# Altium PCB PY32F002BF1xP_START.PcbDoc (part 1 of 2)
Units mil, origin at the board's own origin, x right, y up, seen from the top; angles counter-clockwise.
Board outline 1771.65 x 3929.06 mil, 2 copper layers (Top Layer, Bottom Layer), stack 21 mil thick; 129 components, 114 nets, 456 pads, 229 vias.
Unrouted connection lines stored in the file: 5.
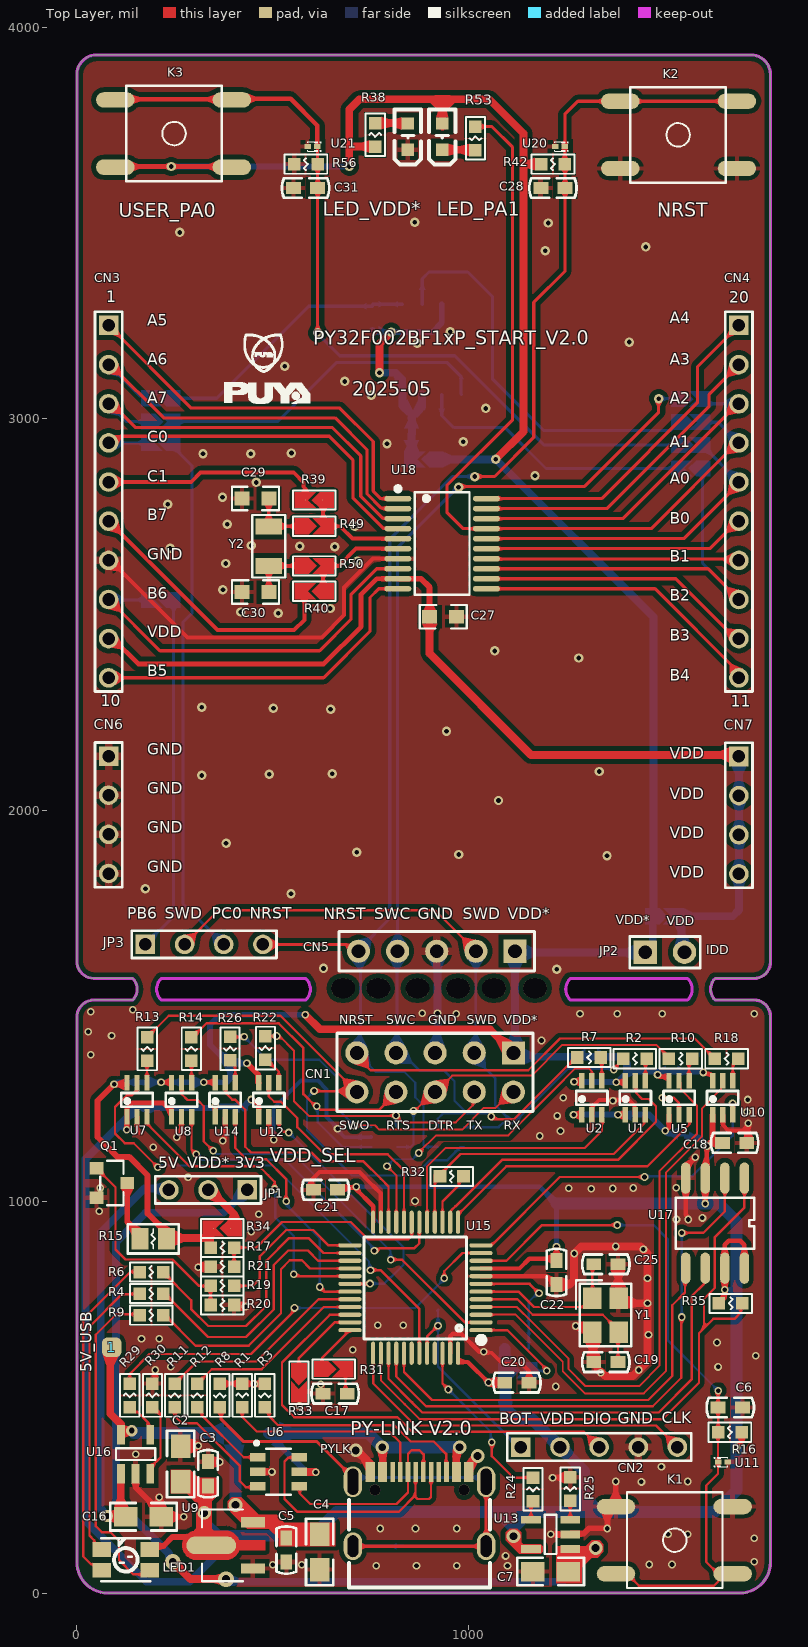
[diagram p0: Top Layer view]
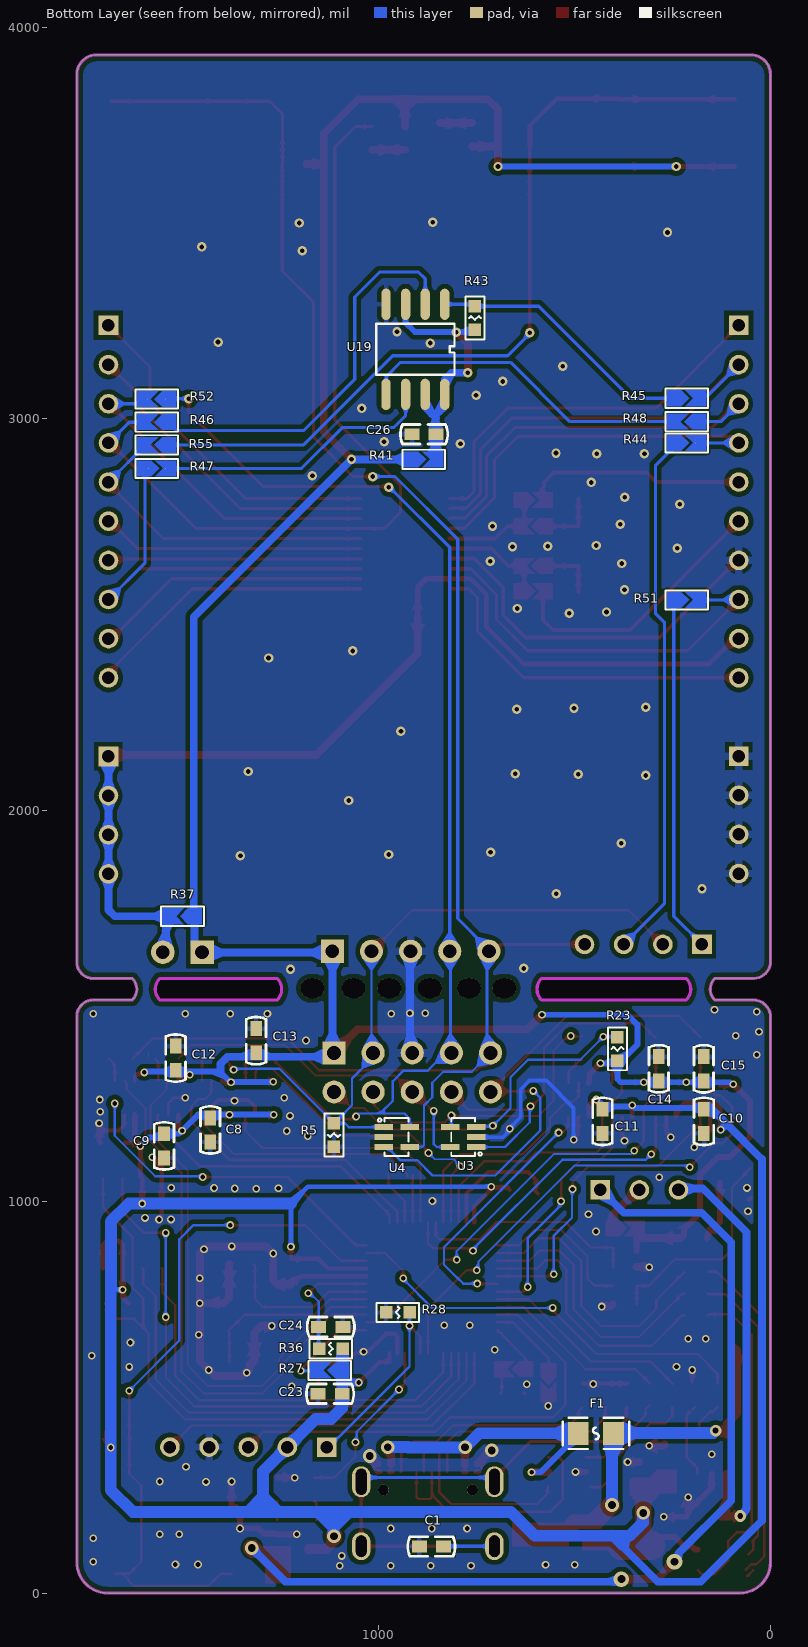
[diagram p1: Bottom Layer view, seen from below]

## Layer stack, top to bottom
Top Solder: solder mask 0.4, Solder Resist, Dk 3.5
Top Layer: signal copper 1.4
Dielectric 2: prepreg 2.8, Composite dielectric, Dk 4.1
Dielectric 1: prepreg 12.6, Composite dielectric, Dk 4.1
Dielectric 3: prepreg 2.8, Composite dielectric, Dk 4.1
Bottom Layer: signal copper 1.4
Bottom Solder: solder mask 0.4, Solder Resist, Dk 3.5

## Board outline
0,78.74 0,1470 cw(c43.75,1471.25) 42.5,1515 142.5,1515 ccw(c115,1542.5) 142.5,1570 42.5,1570 cw(c43.75,1613.75) 0,1615 0,3879.06 cw(c50,3879.06) 50,3929.06 1721.65,3929.06 cw(c1721.65,3879.06) 1771.65,3879.06 1771.65,1611.65 cw(c1730,1611.65) 1730,1570 1630,1570 ccw(c1657.5,1542.5) 1630,1515 1730,1515 cw(c1730,1473.35) 1771.65,1473.35 1771.65,78.74 cw(c1692.91,78.74) 1692.91,0 78.74,0 cw(c78.74,78.74)
cut-out: 1260,1515 cw(c1287.5,1542.5) 1260,1570 1560,1570 cw(c1532.5,1542.5) 1560,1515
cut-out: 215,1515 cw(c242.5,1542.5) 215,1570 585,1570 cw(c557.5,1542.5) 585,1515
cut-out: 215,1515 cw(c242.5,1542.5) 215,1570 585,1570 cw(c557.5,1542.5) 585,1515 565,1515
cut-out: 1260,1515 cw(c1287.5,1542.5) 1260,1570 1560,1570 cw(c1532.5,1542.5) 1560,1515

## Design rules (kind name [scope] priority, off if disabled: settings)
Clearance polygon [InPolygon] p1: gap=12 ignorepadtopadclearanceinfootprint=TRUE
Clearance [All] p2: gap=8 ignorepadtopadclearanceinfootprint=TRUE
HoleToHoleClearance [All] p1: gap=1 allowstackedmicrovias=TRUE
MinimumSolderMaskSliver [All] p1: minsoldermaskwidth=0
PlaneClearance [All] p1: clearance=8
PlaneConnect [All] p1: planeconnectstyle=Direct reliefexpansion=20 reliefentries=4 reliefconductorwidth=10 reliefairgap=10
PolygonConnect [All] p1: thpad.connectstyle=Relief thpad.reliefconductorwidth=20 thpad.reliefentries=4 thpad.polygonreliefangle="90 Angle" thpad.airgapwidth=10 smdpad.connectstyle=Relief smdpad.reliefconductorwidth=12 smdpad.reliefentries=4 smdpad.polygonreliefangle="90 Angle" smdpad.airgapwidth=10 via.connectstyle=Direct via.reliefconductorwidth=10 via.reliefentries=4 via.polygonreliefangle="90 Angle" via.airgapwidth=10
RoutingVias [All] p1: holewidth=28 width=50 viastyle="Through Hole" minholewidth=28 minwidth=50 maxholewidth=28 maxwidth=50
SilkToSilkClearance [All] p1: silktosilkclearance=0
SilkToSolderMaskClearance [IsPad] p1: minsilkscreentomaskgap=0 clearancetoexposedcopper=TRUE
SolderMaskExpansion [All] p1: expansion=4 istentingtop=FALSE
UnRoutedNet [All] p1: checkbadconnections=TRUE
Width [All] p1: maxlimit=100 minlimit=5 preferedwidth=8
23 further rules are at their usual default settings.

## Classes and differential pairs
component class PY32F002BF1xP_START: 3 C26 C27 C28 C29 C30 C31 CN3 CN4 CN5 CN6 CN7 JP2 JP3 K2 K3 LED_PA1 LED_VDD* R37 R38 R39 R40 R41 R42 R43 R44 R45 R46 R47 R48 R49 R50 R51 R52 R53 R55 R56 U18 U19 U20 U21 Y2
component class PY32F403C1xT_LINK: 1 C1 C2 C3 C4 C5 C6 C7 C8 C9 C10 C11 C12 C13 C14 C15 C16 C17 C18 C19 C20 C21 C22 C23 C24 C25 CN1 CN2 F1 JP1 K1 LED1 PYLK Q1 R1 R2 R3 R4 R5 R6 R7 R8 R9 R10 R11 R12 R13 R14 R15 R16 R17 R18 R19 R20 R21 R22 R23 R24 R25 R26 R27 R28 R29 R30 R31 R32 R33 R34 R35 R36 U1 U2 U3 U4 U5 U6 U7 U8 U9 U10 U11 U12 U13 U14 U15 U16 U17 Y1

## Components (designator, comment, footprint, x,y, rotation, side; value= is the part's Value field where it differs from the comment)
1 "TP_SIN" TP_SIN 89.02,627.93 r90 top
C1 "4.7nF" C0603 866,119 r180 bottom
C2 "10uF" C0805 265,330 r270 top
C3 "100nF" C0603 335,305 r270 top
C4 "10uF" C0805 620,105 r90 top
C5 "100nF" C0603 535,110 r90 top
C6 "100nF" C0603 1669,474 r180 top
C7 "10uF" C0805 1210,55 r0 top
C8 "100nF" C0603 1431,1183 r90 bottom value=104
C9 "100nF" C0603 1548.9,1142.3 r90 bottom value=104
C10 "100nF" C0603 170.2,1204.9 r90 bottom value=104
C11 "100nF" C0603 429,1204.9 r90 bottom value=104
C12 "100nF" C0603 1519.4,1366.6 r270 bottom value=104
C13 "100nF" C0603 1313.8,1411.1 r270 bottom value=104
C14 "100nF" C0603 285.5,1339.2 r270 bottom value=104
C15 "100nF" C0603 170.5,1339.2 r270 bottom value=104
C16 "10uF" C0805 170,195 r180 top
C17 "100nF" C0603 659.59,509.5 r0 top
C18 "100nF" C0603 1680,1150 r180 top value=104
C19 "22pF" C0603 1351.12,590 r0 top
C20 "100nF" C0603 1123.87,537.59 r180 top value=104
C21 "100nF" C0603 635,1030 r0 top value=104
C22 "100nF" C0603 1225.12,819 r90 top value=104
C23 "100nF" C0603 1125,509 r180 bottom value=104
C24 "100nF" C0603 1123.12,680 r0 bottom value=104
C25 "22pF" C0603 1351.12,840 r180 top
C26 "100nF" C0603 885,2960 r180 bottom value=104
C27 "0.1uF/50V" 0603C 935.5,2494 r180 top value=2.2uF
C28 "100nF" C0603 1216,3589 r0 top
C29 "22pF" 0603C 456,2796 r0 top
C30 "22pF" 0603C 456,2557 r180 top
C31 "100nF" C0603 584,3589 r0 top
CN1 "2X5P" HDR2X5 1115,1380 r180 top
CN2 "CON5" CON5 1134,373 r0 top
CN3 "CON10" CON10 81,3238 r270 top
CN4 "CON10" CON10 1691,3238 r270 top
CN5 "Header 5" HDR1X5 1119.26,1639.56 r180 top
CN6 "CON4" CON4 81,2138 r270 top
CN7 "CON4" CON4 1691,2137 r270 top
F1 "JK-SMD0805-050-16V" F0805 446,408 r180 bottom
JP1 "CON3" CON3 435,1030 r180 top
JP2 "CON2" CON2 1452,1637 r0 top
JP3 "CON4" CON4 175,1657 r0 top
K1 "TS-KG02S-AT43F" SW-SMD_4P-L6.0-W6.0-P4.50-LS8.5 1528,135 r180 top
K2 "TS-KG02S-AT43F" SW-SMD_4P-L6.0-W6.0-P4.50-LS8.5 1535,3725 r0 top
K3 "TS-KG02S-AT43F" SW-SMD_4P-L6.0-W6.0-P4.50-LS8.5 249,3728 r180 top
LED1 "MHPA3528RGBCT" LED-ARRAY-SMD_4P-L3.5-W2.8-TL 125,85 r0 top
LED_PA1 "GREEN" 0603_LED 934,3735 r90 top
LED_VDD* "RED" 0603_LED 846,3735 r90 top
PYLK "KH-TYPE-C-16P" USB-C-SMD_KH-TYPE-C-16P 875.2,214.81 r0 top locked
Q1 "2302" SOT23 89.37,1047.4 r90 top value=SI2302
R1 "5.1K" R0603 422.49,504.99 r270 top
R2 "27R" R0603 1425.21,1365 r180 top
R3 "5.1K" R0603 480,505 r90 top
R4 "680R" R0603 190,765 r0 top
R5 "1M" R0603 1115,1170 r90 bottom
R6 "680R" R0603 190,820 r0 top
R7 "27R" R0603 1308.39,1368.1 r180 top
R8 "1M" R0603 365,505 r90 top
R9 "680R" R0603 190,710 r0 top
R10 "27R" R0603 1542.35,1365 r180 top
R11 "27R" R0603 250,505 r90 top
R12 "27R" R0603 307.5,505 r90 top
R13 "27R" R0603 179.66,1390.08 r90 top
R14 "27R" R0603 292.3,1390.1 r90 top
R15 "100R" R0805 195,905 r0 top
R16 "10K" R0603 1668,411 r0 top
R17 "20K" R0603 371.52,882.61 r180 top
R18 "27R" R0603 1659.49,1365 r180 top
R19 "100R" R0603 371.53,784.78 r0 top
R20 "100K" R0603 371.52,735.88 r180 top
R21 "10K" R0603 371.53,833.69 r0 top
R22 "27R" R0603 481.63,1392.11 r90 top
R23 "4.7K" R0603 391,1390 r270 bottom
R24 "4.7K" R0603 1165,265 r270 top
R25 "16K" R0603 1260,266 r270 top
R26 "27R" R0603 391.2,1390.7 r90 top
R27 "0R" JP2_SMD 1126,569 r180 bottom
R28 "10K" R0603 952,717.08 r0 bottom
R29 "4.7K" R0603 135,505 r270 top
R30 "16K" R0603 193,505 r270 top
R31 "0R" JP2_SMD 656,572 r180 top
R32 "680R" R0603 957.46,1064.37 r0 top
R33 "0R" JP2_SMD 566.96,537.4 r90 top
R34 "0R" JP2_SMD 371.52,931.52 r0 top
R35 "100K" R0603 1670,740 r180 top
R36 "10K" R0603 1123,624 r180 bottom
R37 "0R" JP2_SMD 1502,1729 r180 bottom
R38 "680R" R0603 762,3724.89 r270 top
R39 "0R" JP2_SMD 606,2792 r0 top
R40 "0R" JP2_SMD 606,2559 r0 top
R41 "0R/NC" JP2_SMD 886,2896 r0 bottom
R42 "10K" R0603 1216,3650 r0 top
R43 "100K" R0603 755,3257 r270 bottom
R44 "0R" JP2_SMD 214,2938 r0 bottom
R45 "0R/NC" JP2_SMD 214,3052 r0 bottom
R46 "0R/NC" JP2_SMD 1568,2991 r180 bottom
R47 "0R/NC" JP2_SMD 1567.99,2872.75 r0 bottom
R48 "0R/NC" JP2_SMD 214.01,2992.26 r180 bottom
R49 "0R" JP2_SMD 605.99,2725 r180 top
R50 "0R" JP2_SMD 605.99,2624 r180 top
R51 "0R" JP2_SMD 214,2537 r0 bottom
R52 "0R" JP2_SMD 1568,3050 r180 bottom
R53 "680R" R0603 1018,3716 r90 top
R55 "0R" JP2_SMD 1568,2933 r180 bottom
R56 "1.5K" R0603 585,3650 r0 top
U1 "74LVC1T45DW" SOT363 1426.64,1265 r0 top
U2 "74LVC1T45DW" SOT363 1315.21,1265 r0 top
U3 "ESD_6V1" ESD_SOT323-5L 785,1165 r90 bottom value=ESDALC6V1W5
U4 "ESD_6V1" ESD_SOT323-5L 955,1165 r270 bottom value=ESDALC6V1W5
U5 "74LVC1T45DW" SOT363 1538.06,1265 r0 top locked
U6 "USBLC6-2SC6" SOT23-6 515,310 r90 top
U7 "74LVC1T45DW" SOT363 153.55,1260 r0 top locked
U8 "74LVC1T45DW" SOT363 267.26,1260 r0 top
U9 "LM1117F-3.3" SOT-89-3_L4.5-W2.5-P1.50-LS4.2-BR 396.39,122.01 r0 top
U10 "74LVC1T45DW" SOT363 1649.49,1265 r0 top
U11 "ESDALC6V1-1U2" ESD_ST0201 1650,335 r0 top
U12 "74LVC1T45DW" SOT363 490.12,1260 r0 top
U13 "MT9700" SOT23-5 1210,150 r90 top
U14 "74LVC1T45DW" SOT363 378.69,1260 r0 top
U15 "PY32F403C1xT" LQFP-48_L7.0-W7.0-P0.50-LS9.0-BL 865,780 r90 top locked
U16 "MT9700" SOT23-5 150,355 r0 top
U17 "P25Q64SH" SOP-8P 1630,945 r180 top value=SST25VF020B
U18 "PY32F002BF15Px" TSSOP-20_L6.5-W4.4-P0.65-LS6.4-BL 932.97,2680.62 r270 top
U19 "P25Q64SH" SOP-8P 907,3177 r0 bottom value=SST25VF020B
U20 "ESDALC6V1-1U2" ESD_ST0201 1234,3695 r180 top
U21 "ESDALC6V1-1U2" ESD_ST0201 602,3695 r180 top
Y1 "24MHz" CRYSTAL-SMD_4P-L3.2-W2.5-BL 1350.12,710 r270 top
Y2 "32.768KHz" CRYSTAL-SMD_L3.2-W1.5-1 490,2674 r270 top value=X503225MSB2GI

## Footprints (in the part's own frame and the unit in brackets; to place one, negate y for a bottom-side part, rotate by r counter-clockwise, add the part's x,y. Pads: shape width x height; smd on the part's side, far side on the other; paste and mask are expansions set on the pad)
0603_LED [mil]
  rect 31.5x31.5 smd: 1(19,1) 2(-48,1)
  silkscreen extent -86,-33 55,35
0603C [mil]
  rect 38x35 smd: 1(-34.5,0) 2(34.5,0)
  silkscreen extent -60,-30 60,30, body extent -31,-16 32,16, height 12
C0603 [mil]
  rect 38x30 smd: 1(-31,0) 2(31,0)
  silkscreen extent -60,-25 60,25
C0805 [mil]
  rect 60x50 smd: 1(-45,0) 2(45,0)
  silkscreen extent -85,-35 85,35
CON2 [mil]
  rect 60x60 hole 35: 1(0,0)
  round 60 hole 35: 2(100,0)
  silkscreen extent -40,-40 140,40
CON3 [mil]
  rect 50x50 hole 32: 1(0,0)
  round 50 hole 32: 2(100,0) 3(200,0)
  silkscreen extent -35,-35 235,35
CON4 [mil]
  rect 50x50 hole 32: 1(0,0)
  round 50 hole 32: 2(100,0) 3(200,0) 4(300,0)
  silkscreen extent -35,-35 335,35
CON5 [mil]
  rect 50x50 hole 32: 1(0,0)
  round 50 hole 32: 2(100,0) 3(200,0) 4(300,0) 5(400,0)
  silkscreen extent -35,-35 435,35
CON10 [mil]
  rect 50x50 hole 32: 1(0,0)
  round 50 hole 32: 2(100,0) 3(200,0) 4(300,0) 5(400,0) 6(500,0) 7(600,0) 8(700,0) 9(800,0) 10(900,0)
  silkscreen extent -35,-35 935,35
CRYSTAL-SMD_4P-L3.2-W2.5-BL [mm]
  rect 1.4x1.2 smd: 1(-1.1,-0.85) 2(1.1,-0.85) 3(1.1,0.85) 4(-1.1,0.85)
  silkscreen extent -2.26,-1.91 2.03,1.68
CRYSTAL-SMD_L3.2-W1.5-1 [mm]
  rect 1.05x1.7 smd: 1(-1.275,0) 2(1.275,0)
  silkscreen extent -2.03,-1.08 2.03,1.08
ESD_SOT323-5L [mm]
  rect 0.4x1.2 smd mask+0.05: 1(-0.65,-0.85) 2(0,-0.85) 3(0.65,-0.85) 4(0.65,0.85) 5(-0.65,0.85)
  silkscreen extent -1.23,-1.21 1.23,0.77, body extent -1.15,-1.05 1.15,1.05, height 1.1
ESD_ST0201 [mm]
  rect 0.425x0.33 smd mask+0.05: 1(-0.312,0) 2(0.312,0)
  silkscreen extent -0.55,-0.3 0.33,0.3, body extent -0.34,-0.18 0.34,0.18, height 0.34
F0805 [mm]
  rect 1.335x1.5 smd paste-100 mask+0.051: 1(-1.142,0) 2(1.142,0)
  silkscreen extent -2.16,-1.02 2.16,1.02
HDR1X5 [mm] "Connector; Header; 5 Position"
  rect 1.5x1.5 hole 0.9: 1(0,0)
  round 1.5 hole 0.9: 2(2.54,0) 3(5.08,0) 4(7.62,0) 5(10.16,0)
  silkscreen extent -1.27,-1.27 11.43,1.27
HDR2X5 [mm] "Connector; Header; 4x2 Position"
  rect 1.5x1.5 hole 0.9: 1(0,0)
  round 1.5 hole 0.9: 2(0,2.54) 3(2.54,0) 4(2.54,2.54) 5(5.08,0) 6(5.08,2.54) 7(7.62,0) 8(7.62,2.54) 9(10.16,0) 10(10.16,2.54)
  silkscreen extent -1.27,-1.27 11.43,3.81
JP2_SMD [mil]
  round 1 smd: 1(21.75,0) 2(-23.03,0.03)
  Top Layer region: -49.77,20.03 -49.77,20.03 3.72,20.03 -16.28,0.03 3.72,-19.98 -49.78,-19.98 -49.78,-19.98
  Top Layer region: -6.25,0 13.75,20 49.75,20 49.75,-20 49.75,-20 13.75,-20
  silkscreen extent -55,-25 54,25
LED-ARRAY-SMD_4P-L3.5-W2.8-TL [mm]
  rect 1.2x0.95 smd: 1(1.55,0.665) 2(1.55,-0.665) 3(-1.55,-0.665) 4(-1.55,0.665)
  silkscreen extent -1.6,-1.4 1.6,1.4
LQFP-48_L7.0-W7.0-P0.50-LS9.0-BL [mm]
  oval 0.27x1.5 smd mask+0.05: 1(-2.75,-4.25) 2(-2.25,-4.25) 3(-1.75,-4.25) 4(-1.25,-4.25) 5(-0.75,-4.25) 6(-0.25,-4.25) 7(0.25,-4.25) 8(0.75,-4.25) 9(1.25,-4.25) 10(1.75,-4.25) 11(2.25,-4.25) 12(2.75,-4.25) 25(2.75,4.25) 26(2.25,4.25) 27(1.75,4.25) 28(1.25,4.25) 29(0.75,4.25) 30(0.25,4.25) 31(-0.25,4.25) 32(-0.75,4.25) 33(-1.25,4.25) 34(-1.75,4.25) 35(-2.25,4.25) 36(-2.75,4.25)
  oval 1.5x0.27 smd mask+0.05: 13(4.25,-2.75) 14(4.25,-2.25) 15(4.25,-1.75) 16(4.25,-1.25) 17(4.25,-0.75) 18(4.25,-0.25) 19(4.25,0.25) 20(4.25,0.75) 21(4.25,1.25) 22(4.25,1.75) 23(4.25,2.25) 24(4.25,2.75) 37(-4.25,2.75) 38(-4.25,2.25) 39(-4.25,1.75) 40(-4.25,1.25) 41(-4.25,0.75) 42(-4.25,0.25) 43(-4.25,-0.25) 44(-4.25,-0.75) 45(-4.25,-1.25) 46(-4.25,-1.75) 47(-4.25,-2.25) 48(-4.25,-2.75)
  silkscreen extent -3.59,-4.46 3.3,3.34
R0603 [mil]
  rect 32x32 smd: 1(-30,0) 2(30,0)
  silkscreen extent -55,-24 54,25
R0805 [mm]
  rect 1.1x1.4 smd: 1(-0.85,0) 2(0.85,0)
  silkscreen extent -1.65,-0.95 1.65,0.95
SOP-8P [mil]
  oval 24x80 smd: 1(-75,-115) 2(-25,-115) 3(25,-115) 4(75,-115) 5(75,115) 6(25,115) 7(-25,115) 8(-75,115)
  silkscreen extent -100,-65 100,65
SOT23 [mm]
  rect 0.8x0.9 smd: 1(0.95,1) 2(-0.95,1) 3(0,-1)
  silkscreen extent -1.45,-0.75 1.45,0.75
SOT23-5 [mil]
  rect 20x50 smd: 1(-37.5,-50) 2(0,-50) 3(37.5,-50) 4(37.5,50) 5(-37.5,50)
  silkscreen extent -50,-15 50,15
SOT23-6 [mm]
  rect 0.55x1 smd: 1(0.95,1.35) 2(0,1.35) 3(-0.95,1.35) 4(-0.95,-1.35) 5(0,-1.35) 6(0.95,-1.35)
  silkscreen extent -1.5,-0.8 1.96,1.52
SOT363 [mm]
  rect 0.35x1 smd: 1(-0.65,-1.1) 2(0,-1.1) 3(0.65,-1.1) 4(0.65,1.1) 5(0,1.1) 6(-0.65,1.1)
  silkscreen extent -1.02,-0.45 1.02,0.45, body extent -1,-1.1 1,1.16, height 1
SOT-89-3_L4.5-W2.5-P1.50-LS4.2-BR [mm]
  rect 1.575x0.672 smd: 1(1.356,-1.5) 3(1.356,1.5)
  oval 3.226x1.14 smd: 2(-1.356,0)
  Top Layer region: -2.283,0.95 -0.429,0.95 -0.384,0.949 -0.34,0.946 -0.296,0.94 -0.252,0.933 -0.208,0.924 -0.165,0.912 -0.123,0.899 -0.081,0.884 -0.04,0.866 0,0.847 0.04,0.826 0.078,0.803 0.115,0.779 0.151,0.752 0.185,0.724 0.219,0.695 0.251,0.664 0.281,0.631 0.31,0.597 0.337,0.562 0.362,0.525 0.386,0.488 0.408,0.449 0.428,0.409 0.447,0.33 2.144,0.33 2.144,-0.33 0.447,-0.33 0.428,-0.409 0.408,-0.449 0.386,-0.488 0.362,-0.526 0.337,-0.562 0.31,-0.597 0.281,-0.631 0.251,-0.664 0.219,-0.695 0.185,-0.725 0.151,-0.753 0.115,-0.779 0.078,-0.804 0.04,-0.827 0,-0.848 -0.04,-0.867 -0.081,-0.884 -0.123,-0.899 -0.165,-0.913 -0.208,-0.924 -0.252,-0.934 -0.296,-0.941 -0.34,-0.946 -0.384,-0.949 -0.429,-0.95 -2.283,-0.95 -2.328,-0.949 -2.372,-0.946 -2.416,-0.941 -2.46,-0.934 -2.504,-0.924 -2.547,-0.913 -2.589,-0.899 -2.631,-0.884 -2.672,-0.867 -2.713,-0.848 -2.752,-0.827 -2.79,-0.804 -2.827,-0.779 -2.863,-0.753 -2.898,-0.725 -2.931,-0.695 -2.963,-0.664 -2.993,-0.631 -3.022,-0.597 -3.049,-0.562 -3.075,-0.526 -3.098,-0.488 -3.12,-0.449 -3.141,-0.409 -3.159,-0.369 -3.175,-0.327 -3.189,-0.285 -3.202,-0.242 -3.212,-0.199 -3.22,-0.155 -3.227,-0.111 -3.231,-0.067 -3.233,-0.022 -3.233,0.022 -3.231,0.067 -3.227,0.111 -3.22,0.155 -3.212,0.199 -3.202,0.242 -3.189,0.285 -3.175,0.327 -3.159,0.369 -3.141,0.409 -3.12,0.449 -3.098,0.488 -3.075,0.525 -3.049,0.562 -3.022,0.597 -2.993,0.631 -2.963,0.664 -2.931,0.695 -2.898,0.724 -2.863,0.752 -2.827,0.779 -2.79,0.803 -2.752,0.826 -2.713,0.847 -2.672,0.866 -2.631,0.884 -2.589,0.899 -2.547,0.912 -2.504,0.924 -2.46,0.933 -2.416,0.94 -2.372,0.946 -2.328,0.949 -2.283,0.95
  silkscreen extent -1.95,-2.33 0.7,2.33
SW-SMD_4P-L6.0-W6.0-P4.50-LS8.5 [mm]
  oval 2.5x1 smd: 1(-3.734,2.177) 2(3.835,2.177) 3(-3.734,-2.184) 4(3.835,-2.184)
  silkscreen extent -3.08,-3.1 3.12,3.09, body extent -4.48,-3 4.52,3, height 8.95
TP_SIN [mil]
  rrect60% 50x50 smd: 1(0,0)
TSSOP-20_L6.5-W4.4-P0.65-LS6.4-BL [mil]
  oval 14.33x68.58 smd mask+2: 1(-115.16,-113.03) 2(-89.57,-113.03) 3(-63.98,-113.03) 4(-38.39,-113.03) 5(-12.79,-113.03) 6(12.8,-113.03) 7(38.39,-113.03) 8(63.98,-113.03) 9(89.57,-113.03) 10(115.16,-113.03) 11(115.16,113.03) 12(89.57,113.03) 13(63.98,113.03) 14(38.39,113.03) 15(12.8,113.03) 16(-12.79,113.03) 17(-38.39,113.03) 18(-63.98,113.03) 19(-89.57,113.03) 20(-115.16,113.03)
  silkscreen extent -146,-119 131,70
USB-C-SMD_KH-TYPE-C-16P [mm]
  oval 1.2x2 hole 0.7 slot 1.7 at 90 deg: 1(-4.32,1.765) 2(4.32,1.765)
  oval 1.2x1.8 hole 0.7 slot 1.4 at 90 deg: 3(-4.32,-2.415) 4(4.32,-2.415)
  rect 0.3x1.3 smd: A1(-3.35,2.415) A4(-2.55,2.415) A5(-1.25,2.415) A6(-0.25,2.415) A7(0.25,2.415) A8(1.25,2.415) A9(2.55,2.415) A12(3.35,2.415) B1(3.05,2.415) B4(2.25,2.415) B5(1.75,2.415) B6(0.75,2.415) B7(-0.75,2.415) B8(-1.75,2.415) B9(-2.25,2.415) B12(-3.05,2.415)
  round 0.7 hole 0.7 unplated: ""(-2.89,1.235) ""(2.89,1.235)
  silkscreen extent -4.57,-5.08 4.57,0.57

## Part data
C1 C3 C5 C6 C17 C19 C25 C28 C31: library part C0603, PCB DECAL=0603
C2 C4 C7 C16: library part C0805, PCB DECAL=0805
C8 C9 C10 C11 C12 C13 C14 C15 C18 C20 C21 C22 C23 C24 C26: library part 贴片高压陶瓷电容, "Capacitor (Semiconductor SIM Model)", 器件封装(外观)=0603
C27: library part CAP, "Capacitor", LatestRevisionDate=17-Jul-2002, LatestRevisionNote="Re-released for DXP Platform.", PackageReference=RAD-0.3, Published=8-Jun-2000, Publisher="Altium Limited"
C29 C30: library part Cap, "Capacitor", Published=8-Jun-2000, Publisher="Altium Limited", Revision="July-2002: Re-released for DXP Platform."
CN1: Color=黑色, Current Rating (Max)=-, JLCPCB Part Class="Extended Part", LCSC Part Name="间距:2.54mm 2x5P 直插 方针", Manufacturer=XFCN(兴飞), Manufacturer Part=PZ254V-12-10P, Operating Temperature Range=-40℃~+105℃, Add into BOM=yes, Circluar Pins/Square Pins=方针, Contact Material=黄铜, Contact Plating=-, Convert to PCB=yes, Datasheet=https://atta.szlcsc.com/upload/public/pdf/source/20200309/C492422_5020CEA01BE7051F9EA9DD81AB0A25E3.pdf, Device=PZ254V-12-10P, Insulation Height=2.5mm, Length of End Connection Pin=3mm, Length of Mating Pin=6mm, Mounting Type=直插, Number of Pins=10P, Number of Rows=双排, Pin Structure=2x5P, Pitch=2.54mm, Row Spacing=2.54mm, Supplier=LCSC, Supplier Footprint=插件,P=2.54mm, Supplier Part=C492422, Symbol=PZ254V-12-10P, Voltage Rating (Max)=-
CN5: "Header, 5-Pin", LatestRevisionDate=17-Jul-2002, LatestRevisionNote="Re-released for DXP Platform.", Publisher="Altium Limited"
F1: Current - Max=100A, Hold Current=500mA, JLCPCB Part Class="Extended Part", LCSC Part Name="6V 0.5A 贴片自恢复", Manufacturer=JK(金科), Operating Temperature=-40℃~+85℃, Power Dissipation=600mW, Resistance - Initial (Ri) (Min)=150mΩ, Resistance - Post Trip (R1) (Max)=850mΩ, Trip Current=1A, Voltage - Max=6V, Add into BOM=yes, Convert to PCB=yes, Datasheet=https://atta.szlcsc.com/upload/public/pdf/source/20190306/C369151_789C15D625FD73830E24950182550D65.pdf, Device=JK-SMD0805-050-16V, Manufacturer Part=JK-SMD0805-050-16V, Supplier=LCSC, Supplier Footprint=SMD, Supplier Part=C968441, Symbol=JK-SMD0805-050-16V, Time to Trip(Max)=100ms
JP2: library part CON2_DIP
K1 K2 K3: Actuator/Cap Color=黑色, Contact Current=50mA, Insulation Resistance=100MΩ, JLCPCB Part Class=扩展库, LCSC Part Name="6*6*4.3mm 立贴 轻触开关", Manufacturer=HANBO(汉博), Operating Force=250gf, Voltage Rating (DC)=12V, Actuator Style=圆形按钮, Add into BOM=yes, Circuit=单刀单掷, Convert to PCB=yes, Datasheet=https://atta.szlcsc.com/upload/public/pdf/source/20221110/4B16732C66B2A039D9853E84B21A4EEA.pdf, Device=TS-KG02S-AT43F, Manufacturer Part=TS-KG02S-AT43F, Mechanical Life=-, Mounting Style=立贴, Pin Style=鸥翼型, Strike Gundam=不带, Supplier=LCSC, Supplier Footprint=SMD, Supplier Part=C2874283, Switch Height=4.3mm, Switch Length=6mm, Switch Width=6mm, Symbol=TS-KG02S-AT43F
LED1: JLCPCB Part Class=扩展库, LCSC Part Name=RGB三色, Manufacturer=MEIHUA(美华), Add into BOM=yes, Convert to PCB=yes, Datasheet=https://atta.szlcsc.com/upload/public/pdf/source/20190902/C409779_9EA0C46D876E94D2A4E683BAC3DDD702.pdf, Device=MHPA3528RGBCT, Manufacturer Part=MHPA3528RGBCT, Supplier=LCSC, Supplier Footprint=SMD3528, Supplier Part=C409779, Symbol=MHPA3528RGBCT
LED_PA1 LED_VDD*: library part PDI-E803_Dup1
PYLK: BOM_JLCPCB Part Class="Extended Part", BOM_Manufacturer="Shenzhen Kinghelm Elec", BOM_Manufacturer Part=KH-TYPE-C-16P, BOM_Supplier=LCSC, BOM_Supplier Part=C709357, Contributor=LCSC, spicePre=U, spiceSymbolName=KH-TYPE-C-16P
Q1: library part "MOSFET N", "MOSFET N", 器件封装(外观)=SOT23
R1 R2 R3 R4 R5 R6 R7 R8 R9 R10 R11 R12 R13 R14 R16 R17 R18 R19 R20 R21 R22 R23 R24 R26 R27 R28 R29 R31 R32 R33 R34 R35 R36 R37 R38 R39 R40 R41 R42 R43 R44 R45 R46 R47 R48 R49 R50 R51 R52 R53 R55 R56: library part R0603, PCB DECAL=0603
R15: library part R0805, PCB DECAL=0805
R25 R30: library part R0603_7, "0603WAF1602T5E 16KΩ(1602) ±1%", PCB DECAL=0603
U3 U4: library part ESDALC6V1W5, "Dual Transil array for ESD protection", Manufacturer=STMICROELECTRONICS, ComponentLink1Description=STM_ESD_ESDALC6V1W5.pdf, ComponentLink1URL=http://tunmcdsvn.tun.st.com/Component_Datasheet_Library/Trunk/Diodes/STM_ESD_ESDALC6V1W5, ECCN_EU=NEC, ECCN_US=EAR99, Initial_Board_Reference=MB1262, Internal_Part_Number=MCD-00136, Manufacturer_Part_Number=ESDALC6V1W5, Part_Type=Diode, Provided_By=Subcon, Status=Released
U11 U20 U21: "ESD protection 6V1", Manufacturer=STMICROELECTRONICS, ComponentLink1Description=STM_ESD_ESDALC6V1-1U2.pdf, ComponentLink1URL=http://tunmcdsvn.tun.st.com/Component_Datasheet_Library/Trunk/Diodes/STM_ESD_ESDALC6V1-1U2, ECCN_EU=NEC, ECCN_US=EAR99, Initial_Board_Reference=MB1274, Internal_Part_Number=MCD-00170, Manufacturer_Part_Number=ESDALC6V1-1U2, Part_Type=Diode, Provided_By=Subcon, Status=Released
U15: "LQFP48", BOM_Manufacturer=PUYA(普冉), BOM_Manufacturer Part=PY32F403C1xT, spicePre=U, spiceSymbolName=PY32F403C1xT
U17 U19: library part SST25VF010, "SST25VF010", 器件封装(外观)=SOP8
U18: "TSSOP20", BOM_Manufacturer=PUYA(普冉), BOM_Manufacturer Part=PY32F002BF15Px, spicePre=U, spiceSymbolName=PY32F002BF15Px
Y1: library part ABM8AIG-24.000MHZ-82Z-T, "±20ppm , 12.5pF , T_use: -40°C~125°C", Equivalent Series Resistance (ESR)=50Ω, External load capacitor=8pF, Frequency Stability(Full temperature range)=±50ppm, JLCPCB Part Class="Extended Part", LCSC Part Name="24MHz ±20ppm 8pF", Manufacturer=ABRACON, Normal temperature Frequency Tolerance=±20ppm, Operating Temperature=-40℃~+125℃, Add into BOM=yes, Convert to PCB=yes, Datasheet=https://atta.szlcsc.com/upload/public/pdf/source/20210326/C1986479_1F0B0D93791ADB7A90489BA856D17A98.pdf, Device=ABM8AIG-24.000MHZ-82Z-T, Manufacturer Part=ABM8AIG-24.000MHZ-82Z-T, Name=24MHz, Supplier=LCSC, Supplier Footprint=SMD3225-4P, Supplier Part=C1669761, Symbol=ABM8AIG-24.000MHZ-82Z-T
Y2: library part CRYSTAL_1, "Crystal"
U6: Function="ESD EMI fliter"

## Free pads (board coordinates)
  oval 60x50 hole 50 slot 60 at 0 deg unplated: 1(680,1545) 1(770,1545) 1(870,1545) 1(973.55,1545) 1(1065,1545) 1(1170,1545)

## Via types
v1: diameter 19.68, hole 11.81, Top Layer to Bottom Layer, tented both sides, 114 vias
v2: diameter 24, hole 12, Top Layer to Bottom Layer, tented both sides, 61 vias
v3: diameter 19.68, hole 11.81, Top Layer to Bottom Layer, 42 vias
v4: diameter 35, hole 20, Top Layer to Bottom Layer, tented both sides, 8 vias
v5: diameter 30, hole 15, Top Layer to Bottom Layer, tented both sides, 2 vias
v6: diameter 40, hole 20, Top Layer to Bottom Layer, tented both sides, 2 vias

## Nets (pads, with @x,y where several pads share a name; then routed paths per layer and width w, separated by ;. In a path a pad name is that pad's centre, name@x,y a point inside that pad or via, vN(x,y) a via of type N, cw(c..) or ccw(c..) an arc to the next point about the centre after c; other vN are vias at no path point)
3.3V_OUT_EN: R24.1 U15.46 | length 443
  Top Layer w6: U15.46@933.9,612.68 933.9,535.1 v1(949,520) ; v1(1060,385) 1060,349.4 1114.4,295 R24.1@1165,295
  Bottom Layer w6: v1(949,520) 1056.94,412.06 1056.94,388.06 v1(1060,385)
3V3_PYLK: C2.2 C3.2 C8.2 C9.2 C10.2 C11.2 C18.2 C20.2 C21.2 C22.2 C23.2 CN2.2 LED1.1 R16.2 R27.1 R35.2 R36.2 U1.1 U2.1 U5.1 U7.1 U8.1 U9.2 U10.1 U12.1 U13.5 U14.1 U15.9 U15.24 U15.48 U17.3 U17.7 U17.8 | length 7859
  Top Layer w10: v1(445.16,1260.63) 449.42,1260.63 464.53,1245.52 U12.1@464.53,1216.69 ; C21.2@666,1030 C21.2@670.66,1034.66 ; C22.2@1225,854.12 v1(1225,885) ; v1(1685,372) 1698,385 R16.2@1698,411
  Top Layer w11: v1@710,1035 756.73,988.27 U15.24@756.73,947.32 ; U15.48@973.27,612.68 973.27,590.61 973.45,590.42 998.23,590.42 1053.65,535 v1@1055.12,535 ; U15.9@1032.32,829.21 1130.39,829.21 1155.3,854.12 C22.2@1225,854.12
  Top Layer w12: v3(127.35,1183.66) 127.96,1184.27 U7.1@127.96,1216.69 127.96,1237.87 141.96,1251.88 219.81,1251.88 241.67,1230.01 U8.1@241.67,1216.69 ; U14.1@353.1,1216.69 353.99,1217.58 353.12,1218.46 v1(353.12,1246.39) ; C21.2@670.66,1034.66 671.99,1035.99 710.99,1035.99 v1(713.28,1038.28) ; v1(1268.73,1222.03) 1269.06,1221.69 U2.1@1289.62,1221.69 ; v1(1382,1221.9) 1382.21,1221.69 U1.1@1401.05,1221.69 ; v3(1503.01,1181.02) 1512.47,1190.48 U5.1@1512.47,1221.69 1511.58,1220.8 U5.1@1511.8,1220.58 ; v1(1605,995) U17.3@1605,1060 1609.01,1064.01 1609.01,1141.25 v1(1609.87,1142.11) ; 1617.76,1150 C18.2@1649,1150 ; R35.2@1640,740 1655,755 v1(1655,775) U17.7@1655,830 1655,890 1665,900 1695,900 1705,890 U17.8@1705,830
  Top Layer w15: LED1.1@186.02,111.18 193.48,111.18 193.48,111.66 202.14,120.32 221.03,120.32 244.3,143.59 U9.2@313.8,143.59 ; v1(1609.87,1142.11) 1617.76,1150 1623.9,1156.14 U10.1@1623.9,1221.69
  Top Layer w20: v1@1054.87,537.59 C20.2@1092.87,537.59
  Bottom Layer w12: v1(713.28,1038.28) 1181.72,1038.28 1225,995 ; v1(1225,885) 1225,990 ; v1(1655,775) 1683.73,775 1684.65,775
  Bottom Layer w15: C10.2@170.2,1235.9 173.64,1239.34 346.07,1239.34 v1(353.12,1246.39) 356.92,1242.6 422.3,1242.6 C11.2@429,1235.9 429,1244.47 v1(445.16,1260.63) v1@443.56,1262.22 ; v1(1268.73,1222.03) 1462,1222.03 v3(1503.01,1181.02) 1510.73,1173.3 C9.2@1548.9,1173.3 ; C9.2@1558.32,1163.88 1588.1,1163.88 v1(1609.87,1142.11)
  Bottom Layer w20: v3(127.35,1183.66) 112.87,1198.15 111.65,1198.15 ; C10.2@170.2,1244.2 157.7,1244.2 111.65,1198.15 ; 405.3,146.25 287.88,28.84 178.16,28.84 22,185 22,1108.5 111.65,1198.15 ; v1(1051.39,538) 1089.87,538 1094,533.87
  Bottom Layer w30: v4(325,205) 325.96,204.04 325.96,179.91 359.61,146.25 405.3,146.25 602.14,146.25 663.2,207.32 1115.96,207.32 ; 1093,585.78 R36.2@1093,624 ; 1104.25,574.53 R27.1@1104.25,569 1094,558.75 1094,533.87 C23.2@1094,509 1094.82,509 1094.82,472.18 1122,445 1162,445 CN2.2@1234,373 1296,311 1296,207.32 ; v4(1115,145) 1115.96,145.96 1115.96,207.32 ; 1225,995 v1(1605,995) 1638.96,995 1684.65,949.31 1684.65,775 1685,774.65 v1(1685,372) 1685,263.15 1629.17,207.32 1296,207.32 ; 1115.96,207.32 1296,207.32
3V3_USB_PYLK: C7.2 JP1.1 U13.1 | length 2404.2
  Top Layer w20: v6@245.8,80 290.03,35.77 v6(380.96,35.77)
  Bottom Layer w20: v6(245,80) 245,85.41 235.27,95.14 235.27,100.98 100.1,236.16 100.1,895.86 175.6,971.36 374.6,971.36 418.24,1015 420,1015 433.24,1028.24 JP1.1@433.24,1030 ; v6(380.96,35.77) 387.82,28.91 1238.91,28.91 v4(1325,115) v4@1326.78,113.22
5V_OUT_EN: R29.1 U15.11 | length 1065.3
  Top Layer w6: R29.1@135,535 135,560 185.65,610.65 444.42,610.65 555.92,722.16 v1(555.92,728.42) ; v1(938.27,804.07) 938.27,821.87 984.98,868.58 U15.11@1032.32,868.58
  Bottom Layer w6: v1(555.92,728.42) 864.41,728.42 938.27,802.29 v1(938.27,804.07)
5V_USB_CHGR: 1.1 C4.2 C5.2 F1.2 U9.3 U16.5 | length 702.8
  Top Layer w20: 1.1@90,625 85.21,620.21 85.21,458.5 112.5,431.21 U16.5@112.5,405 ; U16.5@112.5,413.09 138.09,413.09 v5(140,415)
  Bottom Layer w30: v5(140,415) 146,409 387.43,409 405,391.43 v4(405,225)
5V_USB_PYLK: C16.2 JP1.3 U16.1 | length 1109.9
  Top Layer w20: v5(77.39,196.82) 78.3,195.91 124.09,195.91 C16.2@125,195 ; U16.1@112.5,304.69 112.5,290 112.19,289.69 112.19,210 C16.2@125,210
  Bottom Layer w20: v5(77.39,196.82) 74.92,197.32 71.21,201.03 69.81,202.43 60.92,215.77 60.92,921.89 172.85,1033.82 231.18,1033.82 JP1.3@235,1030
AD_TVDD: R17.1 R21.2 U15.19 | length 586.3
  Top Layer w6: R21.2@401.52,833.7 R17.1@401.52,882.61 458.79,882.61 523.97,947.79 699.66,947.79 743.59,903.86 846.86,903.86 855.16,912.17 U15.19@855.16,947.32
DIR_RESET: U10.5 U15.3 | length 1394.4
  Top Layer w5: U15.3@1032.32,711.1 1120.66,711.1 1160.03,671.73 1241,590.76 1241,566.99 1297.78,510.22 1448.12,510.22 1504.53,566.63 1504.53,1074.04 1596.97,1166.47 1596.97,1238.45 1645.1,1286.59 1645.1,1303.92 U10.5@1649.49,1308.31
DIR_RTCK_DTR: U5.5 U15.4 | length 1362.6
  Top Layer w5: U15.4@1032.32,730.79 1123.69,730.79 1163.06,691.42 1256,598.48 1256,571.92 1299.09,528.83 1435.95,528.83 1488.53,581.41 1488.53,1078.32 1583.97,1173.76 1583.97,1245.09 1542.45,1286.6 1542.45,1303.92 U5.5@1538.06,1308.31
DIR_TCK_SWCLK: U2.5 U15.21 | length 808
  Top Layer w5: v1(792.12,1090.67) 815.79,1067 U15.21@815.79,947.32 ; v3(873.49,1124.13) 873.49,1125.57 917.33,1169.41 1102.34,1169.41 1216.71,1283.79 1273.38,1340.46 1307.19,1340.46 1315.21,1332.43 U2.5@1315.21,1308.31
  Bottom Layer w5: v1(792.12,1090.67) 809.61,1108.16 857.52,1108.16 v3(873.49,1124.13)
DIR_TDI_VCP_TX: U12.5 U15.20 | length 603.7
  Top Layer w6: U12.5@490.12,1303.31 490.12,1268.77 503.92,1254.98 520.97,1254.98 563.25,1212.7 563.25,1189.92 632.11,1121.06 793.64,1121.06 835.47,1079.24 U15.20@835.47,947.32
DIR_TDO_SWO: U7.5 U15.43 | length 1250.3
  Top Layer w6: U7.5@153.55,1303.31 153.55,1284.73 140.19,1271.38 127.22,1271.38 97.4,1241.56 97.4,1174.28 122.48,1149.2 145.25,1149.2 v3(206.55,1087.9) ; v1(750,825) 775.69,825 874.84,725.85 U15.43@874.84,612.68
  Bottom Layer w5: v3(206.55,1087.9) 211.05,1092.41 500.21,1092.41 746.36,846.25 746.36,828.64 v1(750,825)
DIR_TMS_SWDIO: U1.5 U15.14 | length 784.3
  Top Layer w6: U15.14@953.58,947.32 953.58,973.99 956.95,977.36 956.95,978.29 966.51,987.85 967.44,987.85 1086.13,1106.54 1381.8,1106.54 1479.4,1204.13 1479.4,1243.36 1460.78,1261.98 1443.79,1261.98 1428.52,1277.25 1428.52,1306.42 U1.5@1426.64,1308.31
DIR_TRST_RTS: U8.5 U15.2 | length 1100.7
  Top Layer w6: U8.5@267.26,1303.31 267.85,1302.72 267.85,1274.24 282.53,1259.56 308.14,1259.56 323.94,1243.76 323.94,1153.79 v1(348.06,1129.67) ; v1(801.52,851.68) 830.72,851.68 990.98,691.42 U15.2@1032.32,691.42
  Bottom Layer w5: v1(348.06,1129.67) 356.33,1121.41 553.59,1121.41 801.52,873.48 v1(801.52,851.68)
DIR_VCP_RX: U14.5 U15.22 | length 688.5
  Top Layer w6: U14.5@378.69,1303.31 380.07,1301.93 380.07,1277.14 396.6,1260.6 404.2,1260.6 430,1234.81 430,1140.06 444.61,1125.45 599.3,1125.45 622.05,1102.71 732.18,1102.71 776.38,1058.51 796.1,1038.79 U15.22@796.1,947.32
F_VDD: C26.2 R41.2 R43.2 U19.3 U19.7 U19.8 | length 697.6
  Top Layer w20: v2(773,3117) 773,3191 v2(803,3221)
  Bottom Layer w15: R43.2@755,3227 760.64,3221.36 908.18,3221.36 932,3245.18 U19.3@932,3292
  Bottom Layer w20: v2(773,3117) 814.5,3117 831.23,3100.26 831.23,3062.76 U19.8@832,3062 832,3032.92 854,3010.92 ; 854,3001.95 881.23,3029.18 881.23,3061.23 U19.7@882,3062 ; 856,2896 855,2897 855,2959 C26.2@854,2960 855.99,2961.99 855.99,3003.94